# EAGLE board Smart_LIghts (EAGLE 9.5.1)
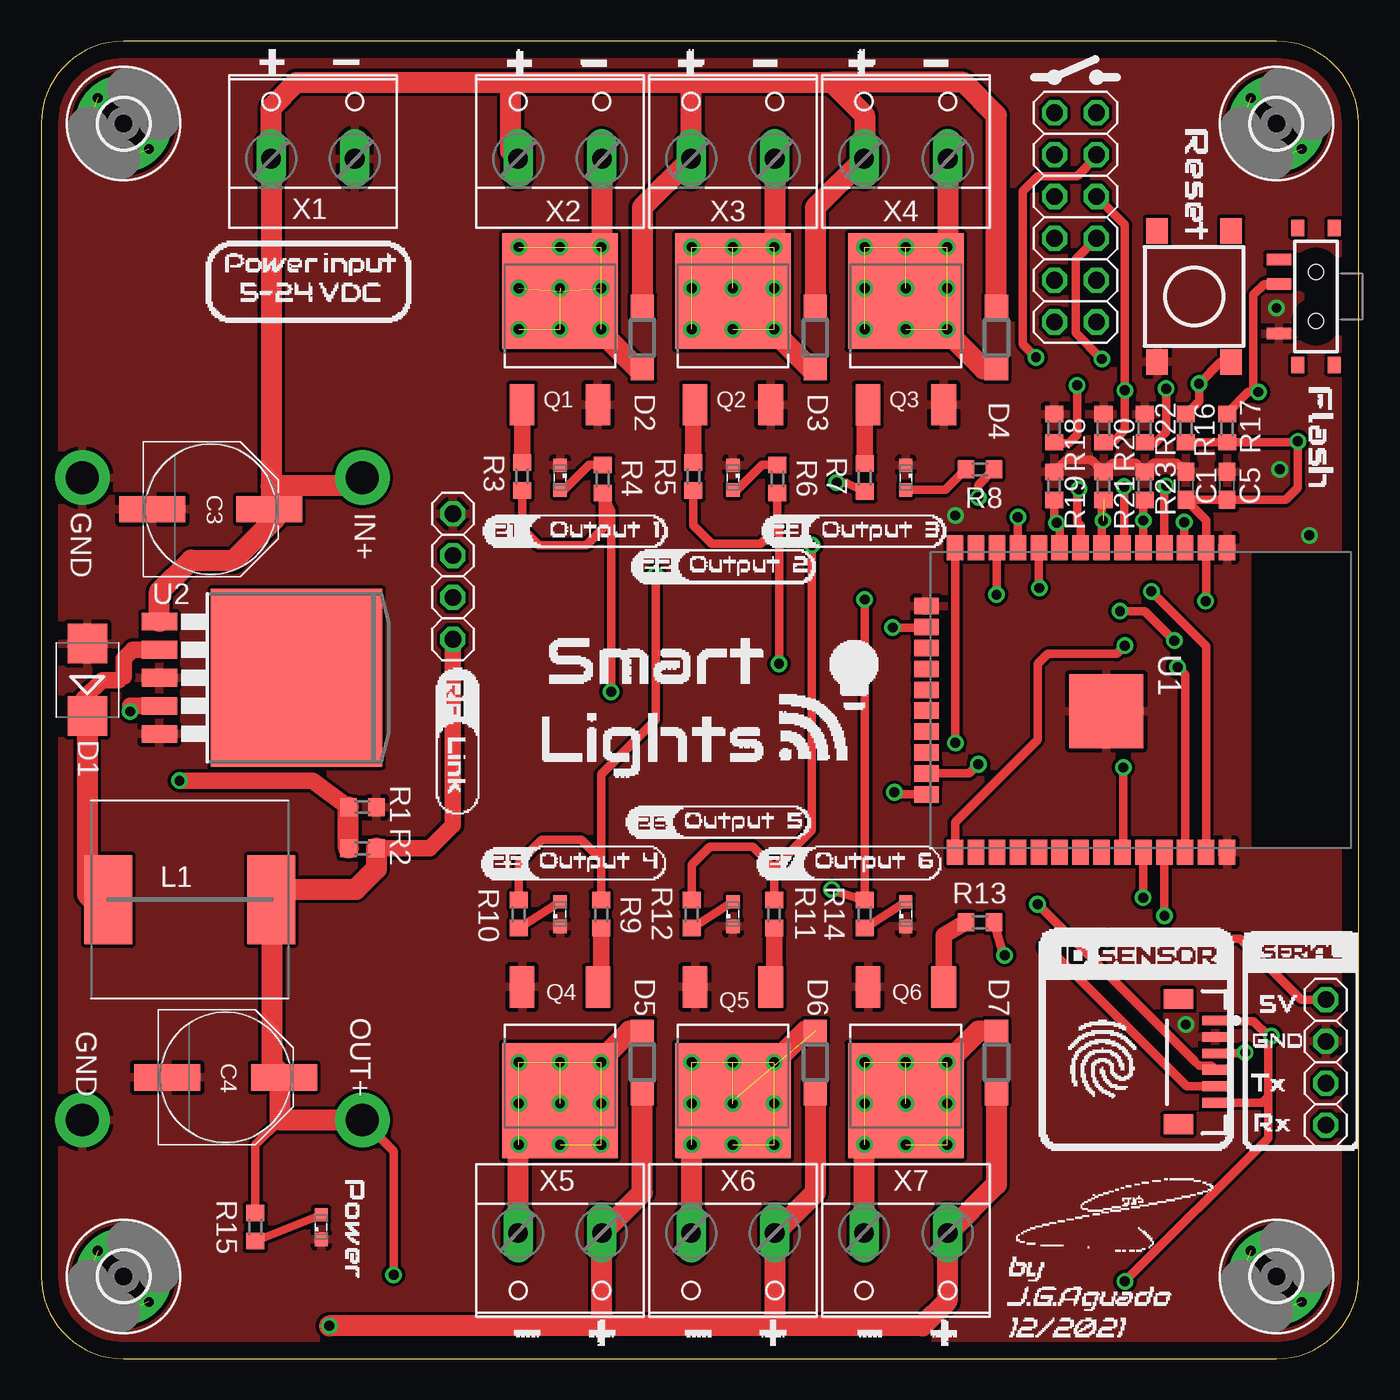
[diagram p0: board, top side]
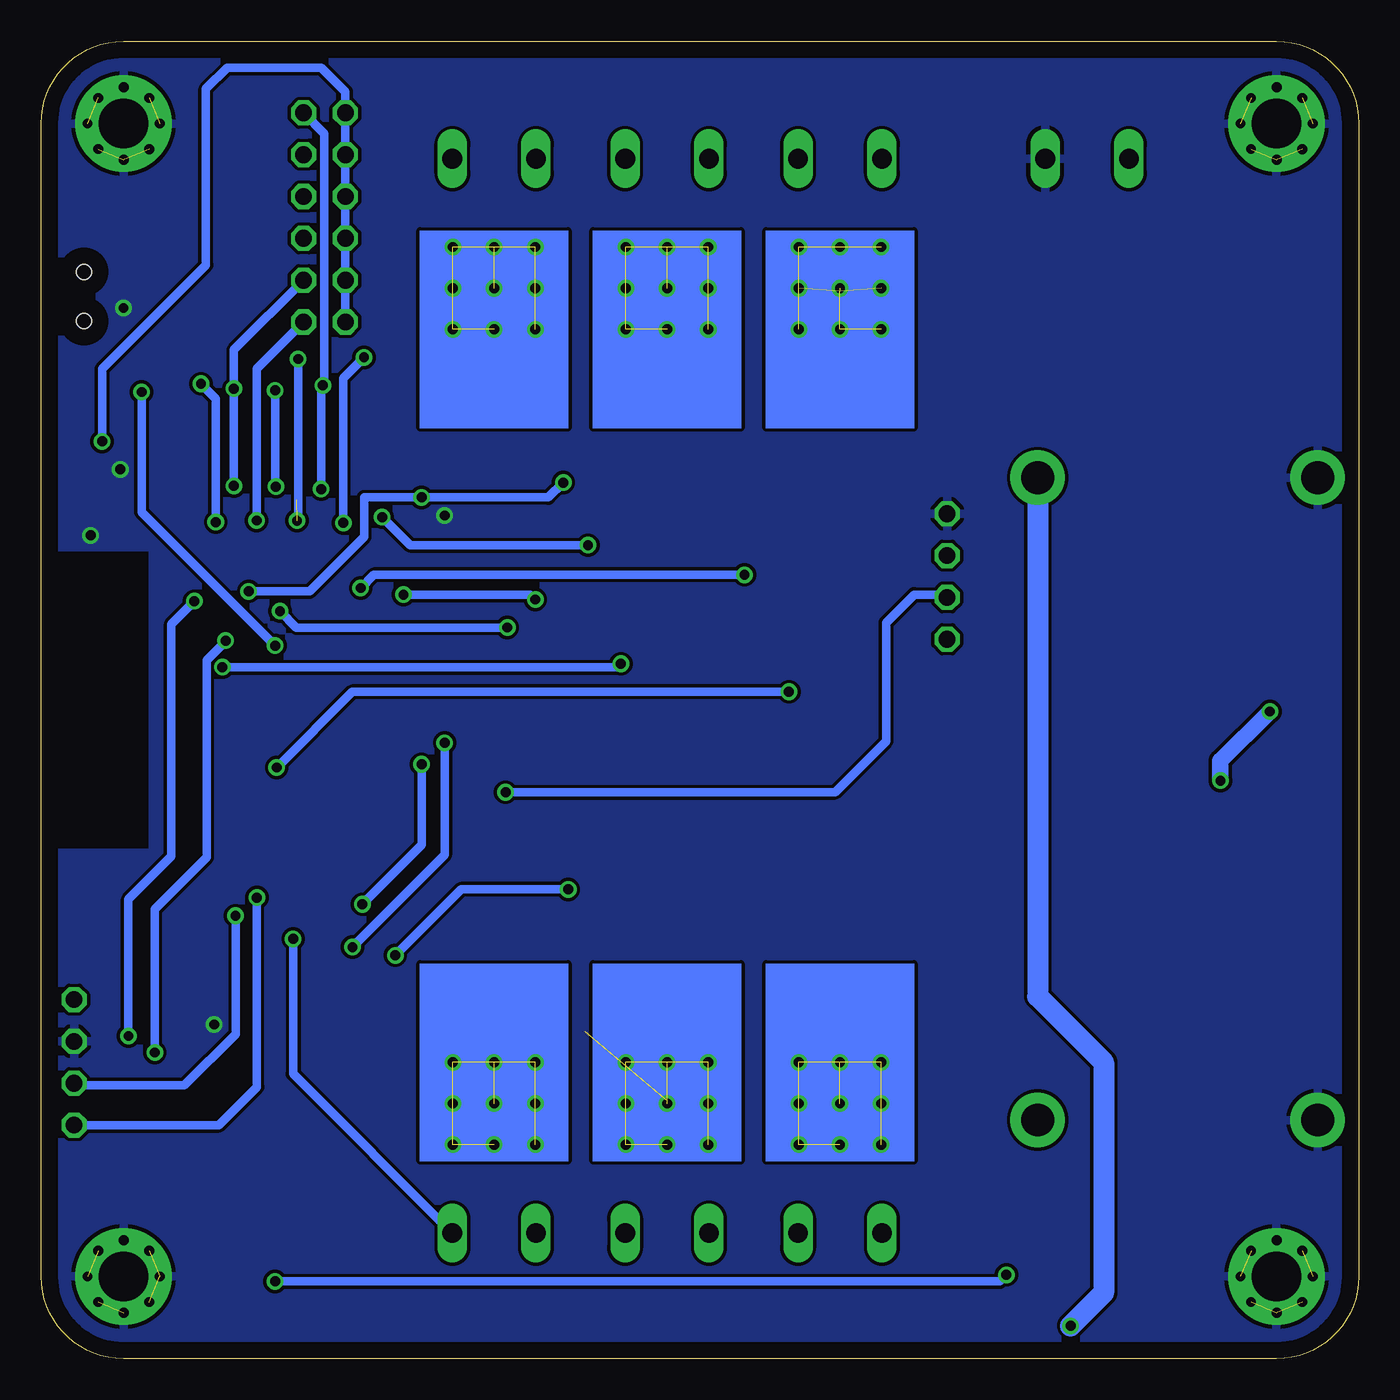
[diagram p1: board, bottom side, seen from below]

Size 80 x 80 mm. Coordinates in mm from the lower left corner, seen from the top.
Outline: 0,5 arc90 5,0 75,0 arc90 80,5 80,75 arc90 75,80 5,80 arc90 0,75 0,5
Copper layers (1*16): Top 0.035mm / dielectric 1.5mm / Bottom 0.035mm
Design rules "default": minimum track width 6mil, minimum drill 0.35mm, track to track 6mil, track to pad 6mil, pad to pad 6mil, via to via 6mil, smd to smd 6mil, copper to edge 40mil, drill to drill 6mil, minimum pad ring 10mil, minimum via ring 8mil, stop-mask expansion 4mil, vias tented up to drill 0mil, thermal gap 10mil
Net classes: 0 default: clearance 0.205 mm; 2 analog: width 0.203 mm, drill 0.33 mm, clearance 0.152 mm

## Footprints (pad centres in the part's own frame; a part is rotated, then mirrored left to right if it is on the bottom)
C0603 = smd 1.1 x 1: 1 -0.85,0; 2 0.85,0
PANASONIC_F = smd 4 x 1.6: + 3.55,0; - -3.55,0
SMB = smd 2.4 x 2.4: A 2.2,0; C -2.2,0
SOD123 = smd 1.4 x 1.4: A 1.9,0; C -1.9,0
3,0-PAD = drill 3 pad 5.842: B3,0 0,0
1X01_2MM = drill 2 pad 3.302: 1 0,0
1X04 = drill 1.016 octagon: 1 -3.81,0; 2 -1.27,0; 3 1.27,0; 4 3.81,0
JST-6-SMD-VERT-1.0MM = smd 0.6 x 1.55: 1 -2.54,1.27; 2 -1.54,1.27; 3 -0.54,1.27; 4 0.46,1.27; 5 1.46,1.27; 6 2.46,1.27 | smd 1.2 x 1.8: P$1 -3.84,-0.955; P$2 3.76,-0.955
2X06 = drill 1.016 octagon: 1 -6.35,-1.27; 2 -6.35,1.27; 3 -3.81,-1.27; 4 -3.81,1.27; 5 -1.27,-1.27; 6 -1.27,1.27; 7 1.27,-1.27; 8 1.27,1.27; 9 3.81,-1.27; 10 3.81,1.27; 11 6.35,-1.27; 12 6.35,1.27
WE-PD_1260/1245/1280/1210 = smd 2.9 x 5.4: 1 -4.95,0; 2 4.95,0
SML0603 = smd 0.8 x 0.8: A 0.75,0; C -0.75,0
INFINEON_TECHNOLOGIES_IRLR2905TRPBF_0 = smd 1.5 x 2.5: 1 -2.3,-4.575; 3 2.3,-4.575 | smd 7 x 7: 4 0,2.325
R0603 = smd 1 x 1.1: 1 -0.85,0; 2 0.85,0
TACTILE_SWITCH_TALL = smd 1.55 x 1.3: A1 -3.975,-2.25; A2 3.975,-2.25; B1 -3.975,2.25; B2 3.975,2.25
KPS-1290 = smd 0.7 x 1.5: O -2.25,2.25; P 0.75,2.25; S 2.25,2.25 | smd 1 x 0.8: P$1 -4.15,1.1; P$2 -4.15,-1.1; P$3 4.15,-1.1; P$4 4.15,1.1 | hole 0.9: -1.5,0; 1.5,0
ESP-32S = smd 1.5 x 1: 1 -9.25,7; 2 -9.25,5.73; 3 -9.25,4.46; 4 -9.25,3.19; 5 -9.25,1.92; 6 -9.25,0.65; 7 -9.25,-0.62; 8 -9.25,-1.89; 9 -9.25,-3.16; 10 -9.25,-4.43; 11 -9.25,-5.7; 12 -9.25,-6.97; 13 -9.25,-8.24; 14 -9.25,-9.51; 25 9.25,-9.51; 26 9.25,-8.24; 27 9.25,-6.97; 28 9.25,-5.7; 29 9.25,-4.43; 30 9.25,-3.16; 31 9.25,-1.89; 32 9.25,-0.62; 33 9.25,0.65; 34 9.25,1.92; 35 9.25,3.19; 36 9.25,4.46; 37 9.25,5.73; 38 9.25,7 | smd 1 x 1.5: 15 -5.7,-11.25; 16 -4.43,-11.25; 17 -3.16,-11.25; 18 -1.89,-11.25; 19 -0.62,-11.25; 20 0.65,-11.25; 21 1.92,-11.25; 22 3.19,-11.25; 23 4.46,-11.25; 24 5.73,-11.25 | smd 4.5 x 4.5: GND 0.68,-0.33
TO263-5 = smd 1.067 x 2.159: 1 -3.404,-5.791; 2 -1.702,-5.791; 3 0,-5.791; 4 1.702,-5.791; 5 3.404,-5.791 | smd 10.8 x 10.41: 6 0,2.54
W237-132 = drill 1.194 long: 1 -2.54,-0.635; 2 2.54,-0.635

## Placement (x,y rotation side)
C1  100nF  [C0603]  69.5,53 90 top
C3  330µ/50V  [PANASONIC_F]  10.29,51.59 0 top
C4  220µ/35V Low ESR  [PANASONIC_F]  11.2,17.09 0 top
C5  22uF  [C0603]  72,53 90 top
D1  SS34  [SMB]  2.81,41.22 90 top
D2  [SOD123]  36.5,62 270 top
D3  [SOD123]  47,62 270 top
D4  [SOD123]  58,62 270 top
D5  [SOD123]  36.5,18 90 top
D6  [SOD123]  47,18 90 top
D7  [SOD123]  58,18 90 top
H1  MOUNT-PAD-ROUND3.0  [3,0-PAD]  5,5 0 top
H2  MOUNT-PAD-ROUND3.0  [3,0-PAD]  5,75 0 top
H3  MOUNT-PAD-ROUND3.0  [3,0-PAD]  75,5 0 top
H4  MOUNT-PAD-ROUND3.0  [3,0-PAD]  75,75 0 top
H5  [1X01_2MM]  19.5,53.5 270 top
H6  [1X01_2MM]  2.5,53.5 270 top
H7  [1X01_2MM]  19.5,14.5 270 top
H8  [1X01_2MM]  2.5,14.5 270 top
J1  [1X04]  25,47.5 90 top
J2  JST_6_PIN_VERTICAL  [JST-6-SMD-VERT-1.0MM]  70,18 270 top
J3  [1X04]  78,18 270 top
JP1  [2X06]  62.8,69.3 270 top
L1  47µH  [WE-PD_1260/1245/1280/1210]  9.03,27.89 0 top
LED1  Green  [SML0603]  17,8 90 top
LED2  Blue  [SML0603]  31.5,53.5 270 top
LED3  Blue  [SML0603]  42,53.5 270 top
LED4  Blue  [SML0603]  52.5,53.5 270 top
LED5  Blue  [SML0603]  31.5,27 90 top
LED6  Blue  [SML0603]  42,27 90 top
LED7  Blue  [SML0603]  52.5,27 90 top
Q1  IRLR2905TRPBF  [INFINEON_TECHNOLOGIES_IRLR2905TRPBF_0]  31.5,62.5 0 top
Q2  IRLR2905TRPBF  [INFINEON_TECHNOLOGIES_IRLR2905TRPBF_0]  42,62.5 0 top
Q3  IRLR2905TRPBF  [INFINEON_TECHNOLOGIES_IRLR2905TRPBF_0]  52.5,62.5 0 top
Q4  IRLR2905TRPBF  [INFINEON_TECHNOLOGIES_IRLR2905TRPBF_0]  31.5,18 180 top
Q5  IRLR2905TRPBF  [INFINEON_TECHNOLOGIES_IRLR2905TRPBF_0]  42,18 180 top
Q6  IRLR2905TRPBF  [INFINEON_TECHNOLOGIES_IRLR2905TRPBF_0]  52.5,18 180 top
R1  1k  [R0603]  19.5,33.5 0 top
R2  1.6k  [R0603]  19.5,31 180 top
R3  100  [R0603]  29.2,53.58 270 top
R4  330  [R0603]  34.1,53.42 90 top
R5  100  [R0603]  39.6,53.58 270 top
R6  330  [R0603]  44.7,53.42 90 top
R7  100  [R0603]  50,53.5 270 top
R8  330  [R0603]  57,54 180 top
R9  100  [R0603]  34,27 90 top
R10  330  [R0603]  29,27 270 top
R11  100  [R0603]  44.5,27 90 top
R12  330  [R0603]  39.5,27 270 top
R13  100  [R0603]  57,26.5 0 top
R14  330  [R0603]  50,27 270 top
R15  470  [R0603]  13,8 90 top
R16  10K  [R0603]  69.5,56.5 270 top
R17  10k  [R0603]  72,56.5 90 top
R18  10K  [R0603]  61.5,56.5 270 top
R19  10K  [R0603]  61.5,53 270 top
R20  10K  [R0603]  64.5,56.5 270 top
R21  10K  [R0603]  64.5,53 270 top
R22  10K  [R0603]  67,56.5 270 top
R23  10K  [R0603]  67,53 270 top
S1  Reset  [TACTILE_SWITCH_TALL]  70,64.5 270 top
S2  SWITCH_SPDT  [KPS-1290]  77.4,64.5 90 top
U1  ESP-32S  [ESP-32S]  65,40 270 top
U2  LM2596S  [TO263-5]  12.97,41.35 270 top
X1  [W237-132]  16.5,73.5 0 top
X2  [W237-132]  31.5,73.5 0 top
X3  [W237-132]  42,73.5 0 top
X4  [W237-132]  52.5,73.5 0 top
X5  [W237-132]  31.5,7 180 top
X6  [W237-132]  42,7 180 top
X7  [W237-132]  52.5,7 180 top

## Library data of the parts
C1 C5 = rcl; SPICEPREFIX: C
C3 = rcl; MF: Panasonic; MFN: EEVFK1H221P; SPICEPREFIX: C
C4 = rcl; MF: Panasonic; MFN: EINTRAGEN!; SPICEPREFIX: C
D1-D7 = diode
H1-H4 = holes
H5-H8 = SparkFun-Connectors
J1 J3 JP1 = pinhead
J2 = SparkFun-Connectors; PROD_ID: CONN-08249; SF_ID: GPS-00579
L1 = Wurth_Elektronik_Passive_rev15b; MF: Wuerth
LED1-LED7 = led
Q1-Q6 = Infineon Technologies - IRLR2905TRPBF; AUTOMOTIVE: No; CENTROID_NOT_SPECIFIED: Yes; CONTINUOUS_DRAIN_CURRENT: 42A; DATASHEET: https://www.infineon.com/dgdl/irlr2905pbf.pdf?fileId=5546d462533600a40153566cc2bb2679; DEPLETION_MODE: False; DEVICE_CLASS_L1: Discrete Semiconductors; DEVICE_CLASS_L2: Transistors; DEVICE_CLASS_L3: MOSFETs; DIGIKEY_DESCRIPTION: TRANS MOSFET N-CH 55V 42A DPAK; DIGIKEY_PART_NUMBER: IRLR2905PBFCT-ND; DRAIN_TO_SOURCE_BREAKDOWN_VOLTAGE: 55V; DRAIN_TO_SOURCE_RESISTANCE: 0.03Ω; DRAIN_TO_SOURCE_VOLTAGE: 55V; FOOTPRINT_URL: http://www.irf.com/package/hexfet/dpakfootprint.pdf; FOOTPRINT_VARIANT_NAME_0: Recommended_Land_Pattern; GATE_CHARGE_AT_VGS: 48nC @ 5V; GATE_TO_SOURCE_VOLTAGE: 16V; HEIGHT: 2.52mm; INPUT_CAPACITACE_AT_VDS: 1700pF @ 25V; LEAD_FREE: Yes; MAX_FORWARD_DIODE_VOLTAGE: 1.3V; MAX_JUNCTION_TEMP: +175°C; MF: Infineon Technologies; MFG_PACKAGE_IDENT: PG-TO252-3; MFG_PACKAGE_IDENT_DATE: 0; MFG_PACKAGE_IDENT_REV: 901; MOUSER_PART_NUMBER: 942-IRLR2905TRPBF; MPN: IRLR2905TRPBF; NUMBER_OF_CHANNELS: 1; NUMBER_OF_N_CHANNELS: 1; PACKAGE: D-Pak; POWER_DISSIPATION: 110W; PREFIX: Q; PULSE_DRAIN_CURRENT: 160A; REVERSE_RECOVERY_CHARGE: 210nC; REVERSE_RECOVERY_TIME: 80ns; ROHS: Yes; RTHJA_MAX: 110°C/W; TEMPERATURE_RANGE_HIGH: +175°C; TEMPERATURE_RANGE_LOW: -55°C; THRESHOLD_VGS_MAX: 2V; THRESHOLD_VGS_MIN: 1V; TURN_OFF_DELAY_TIME: 26ns; TURN_ON_DELAY_TIME: 11ns; VERIFICATION_VERSION: 0.0.0.3
R1-R23 = rcl; SPICEPREFIX: R
S1 = Testing
S2 = SparkFun-Retired; PROD_ID: SWCH-10651
U1 = esp32
U2 = national-semiconductor; MF: NATIONAL SEMICONDUCTOR; MPN: LM2596S-ADJ/NOPB; OC_FARNELL: 9494367; OC_NEWARK: 41K3842
X1-X7 = con-wago-508; OC_FARNELL: unknown; OC_NEWARK: unknown

## Nets
3.3V: C1.1 C4.+ C5.1 H7.1 J1.1 J2.1 J2.6 JP1.1 JP1.3 JP1.5 JP1.7 JP1.9 JP1.11 L1.2 R2.1 R15.2 R16.2 R17.1 U1.2
CH_1: R3.2 R4.1 U1.33
CH_2: R5.2 R6.1 U1.36
CH_3: R7.2 R8.1 U1.37
CH_4: R9.2 R10.1 U1.10
CH_5: R11.2 R12.1 U1.11
CH_6: R13.2 R14.1 U1.12
CLK: U1.20
CMD: U1.19
GND: C1.2 C3.- C4.- C5.2 D1.A H1.B3,0 H2.B3,0 H3.B3,0 H4.B3,0 H6.1 H8.1 J1.4 J2.2 J3.2 LED1.C LED2.C LED3.C LED4.C LED5.C LED6.C LED7.C Q1.3 Q2.3 Q3.3 Q4.3 Q5.3 Q6.3 R1.2 R18.1 R19.1 R20.1 R21.1 R22.1 R23.1 S1.A2 S2.O U1.1 U1.15 U1.38 U1.GND U2.3 U2.5 X1.2
IN_1: JP1.2 R18.2 U1.8
IN_2: JP1.4 R19.2 U1.9
IN_3: JP1.6 R20.2 U1.6
IN_4: JP1.8 R21.2 U1.7
IN_5: JP1.10 R22.2 U1.4
IN_6: JP1.12 R23.2 U1.5
IO0: R17.2 S2.P U1.25
IO4: U1.26
IO5: U1.29
IO14: U1.13
IO16: U1.27
IO17: U1.28
IO18: U1.30
IO19: U1.31
N$1: Q2.1 R5.1
N$2: D1.C L1.1 U2.2
N$3: R1.1 R2.2 U2.4
N$4: D2.A Q1.4 X2.2
N$5: Q1.1 R3.1
N$6: D3.A Q2.4 X3.2
N$7: Q3.1 R7.1
N$8: D4.A Q3.4 X4.2
N$9: Q4.1 R9.1
N$10: D5.A Q4.4 X5.2
N$11: Q5.1 R11.1
N$12: D6.A Q5.4 X6.2
N$13: Q6.1 R13.1
N$14: D7.A Q6.4 X7.2
N$15: LED1.A R15.1
N$16: LED4.A R8.2
N$17: LED2.A R4.2
N$18: LED3.A R6.2
N$19: LED5.A R10.2
N$20: LED6.A R12.2
N$21: LED7.A R14.2
RC_DATA: J1.2 U1.24
RST: R16.1 S1.B2 U1.3
RX: J3.4 U1.34
RXD: J2.4 U1.23
SD0: U1.21
SD1: U1.22
SD2: U1.17
SD3: U1.18
TX: J3.3 U1.35
TXD: J2.3 U1.16
VCC: C3.+ D2.C D3.C D4.C D5.C D6.C D7.C H5.1 J3.1 U2.1 X1.1 X2.1 X3.1 X4.1 X5.1 X6.1 X7.1
WAKE_UP: J2.5 U1.14

## Tracks (layer width: path | path; a pad name or v marks a point on that pad's centre or on a via)
3.3V  (via drill 0.6)
  Top 0.508: 14.5,14.5 13,13 R15.2 | J2.1 71.31,20.5 73.6,20.5 74.5,19.6 | 74.5,19.6 74.7,19.4 v74.7,19.6 | 74.5,19.6 74.5,15.9 | 74.5,15.9 74.14,15.54 J2.6 | 74.5,15.9 74.5,13.4 v65.8,4.7 | v21.4,5.1 21.4,12.6 H7.1 | R16.2 R17.1 76.25,55.65 | 76.25,55.65 v76.3,55.7 | 76.25,55.65 76.3,55.6 76.3,52.9 75.55,52.15 C5.1 C1.1 70.73,50.92 U1.2 70.73,46.03 v70.7,46
  Top 1.016: J1.1 25,32.4 23.6,31 R2.1
  Top 1.27: H7.1 14.5,14.5 14.5,16.84 C4.+ 14,17.84 14,28.5 14.59,28.5 | R2.1 20.35,29.75 19.1,28.5 14.59,28.5 | L1.2 14.59,28.5
  Bottom 0.508: v65.8,4.7 21.8,4.7 v21.4,5.1 | v74.7,19.6 74.7,27.9 72.1,30.5 72.1,44.6 v70.7,46 | v76.3,55.7 76.3,60.1 70,66.4 70,77.1 68.7,78.4 63,78.4 61.53,76.93 JP1.1 JP1.3 JP1.5 JP1.7 JP1.9 JP1.11
CH_1  (via drill 0.6)
  Top 0.508: R3.2 29.2,50.4 30.2,49.4 33.1,49.4 34.1,50.4 R4.1 34.6,51.5 v34.6,40.5 | v65.7,35.9 65.7,30.8 U1.33
  Bottom 0.508: v34.6,40.5 61.1,40.5 v65.7,35.9
CH_2  (via drill 0.6)
  Top 0.508: R5.2 39.6,50.6 40.7,49.5 43.7,49.5 44.7,50.5 44.7,51 | 44.7,51 R6.1 | U1.36 69.46,41.54 v69,42 | v44.8,42.2 44.8,50.9 44.7,51
  Bottom 0.508: v69,42 45,42 v44.8,42.2
CH_3  (via drill 0.6)
  Top 0.508: R7.2 48.88,53.2 v48.3,53.2 | R8.1 56.9,53.05 v56.9,52.3 | U1.37 70.73,43.27 v67.4,46.6
  Bottom 0.508: v48.3,53.2 49.2,52.3 v56.9,52.3 60.4,52.3 60.4,49.9 63.7,46.6 v67.4,46.6
CH_4  (via drill 0.6)
  Top 0.508: R10.1 29,30.1 30.4,31.5 32.8,31.5 34,30.3 R9.2 34,35.5 37.3,38.8 v37.3,47.6 | v60.6,46.8 60.57,46.83 U1.10
  Bottom 0.508: v37.3,47.6 59.8,47.6 v60.6,46.8
CH_5  (via drill 0.6)
  Top 0.508: R11.2 44.5,29.8 | 44.5,29.8 43.2,31.1 40.6,31.1 39.5,30 R12.1 | U1.11 v59.3,51.1 | v46.8,49.4 46.8,32.1 44.5,29.8
  Bottom 0.508: v59.3,51.1 57.6,49.4 v46.8,49.4
CH_6  (via drill 0.6)
  Top 0.508: v48,28.5 48.08,28.42 R14.1 v50,46.1 | v58.5,24.5 58.42,24.58 R13.2 | U1.12 58.03,46.43 v58,46.4
  Bottom 0.508: v48,28.5 54.5,28.5 v58.5,24.5 | v58,46.4 50.3,46.4 v50,46.1
GND  (via drill 0.6)  (16 unrouted)
  Top 0.508: C1.2 68.95,54.4 67.55,54.4 R23.1 66.45,54.4 65.05,54.4 R21.1 63.75,54.6 62.25,54.6 R19.1
  other vias: 75,63.8 69.5,20.3 77,50 55.5,51.2 72.8,5 73.44,6.55 74.99,7.19 76.54,6.55 77.19,5 76.54,3.45 74.99,2.81 73.44,3.45 2.8,5 3.44,6.55 4.99,7.19 6.54,6.55 7.19,5 6.54,3.45 4.99,2.81 3.44,3.45 2.8,75 3.44,76.55 4.99,77.19 6.54,76.55 7.19,75 6.54,73.45 4.99,72.81 3.44,73.45 72.8,75 73.44,76.55 74.99,77.19 76.54,76.55 77.19,75 76.54,73.45 74.99,72.81 73.44,73.45 75.2,54
  pour Top: 5,80 arc90 0,75 0,5 arc90 5,0 75,0 arc90 80,5 80,75 arc90 75,80
  pour Bottom: 5,80 arc90 0,75 0,5 arc90 5,0 75,0 arc90 80,5 80,75 arc90 75,80
IN_1  (via drill 0.6)
  Top 0.508: U1.8 63.11,50.59 62.9,50.8 62.9,52.7 v63,52.8 | v62.9,59.1 62.9,56.1 62.4,55.6 61.55,55.6 R18.2
  Bottom 0.508: JP1.2 62.8,74.38 62.8,59.2 v62.9,59.1 63,59 v63,52.8
IN_2  (via drill 0.6)
  Top 0.508: R19.2 61.5,50.9 v61.65,50.75 61.84,50.56 U1.9 | v60.4,60.8 59.6,61.6 59.6,70.9 60.5,71.8 62.9,71.8 64.07,72.97 JP1.4
  Bottom 0.508: v61.65,50.75 61.65,59.55 v60.4,60.8
IN_3  (via drill 0.6)
  Top 0.508: JP1.6 65.8,68.84 v65.8,58.8 65.8,56.4 65.05,55.65 R20.2 | v65.75,52.95 65.75,49.35 U1.6
  Bottom 0.508: v65.8,58.8 65.8,53 v65.75,52.95
IN_4  (via drill 0.6)  (1 unrouted)
  Top 0.508: R21.2 64.38,52.03 U1.7 | JP1.8 62.8,66.76 62.8,62.3 v64.4,60.7
  Bottom 0.508: v64.4,60.7 64.4,50.96 v64.47,50.89
IN_5  (via drill 0.6)
  Top 0.508: U1.4 68.19,52.89 v68.3,53 | v68.3,58.9 68.3,56.3 67.6,55.6 67.05,55.6 R22.2
  Bottom 0.508: JP1.10 68.3,61.26 v68.3,58.9 v68.3,53
IN_6  (via drill 0.6)
  Top 0.508: R23.2 66.92,52.07 v66.92,50.9 U1.5
  Bottom 0.508: JP1.12 66.92,60.1 v66.92,50.9
IO0  (via drill 0.6)
  Top 0.508: S2.P 74.25,65.25 73.6,64.6 73.6,59 v73.9,58.7 73.3,58.7 72,57.4 R17.2 | U1.25 55.49,32.59 60.5,37.6 60.5,42.2 61.1,42.8 65.3,42.8 v65.8,43.3
  Bottom 0.508: v65.8,43.3 73.9,51.4 v73.9,58.7
N$1
  Top 1.016: R5.1 39.6,57.83 Q2.1
N$2
  Top 1.016: U2.2 5.55,43.05 5,42.5 5,41.4 4.9,41.4 4.7,41.2 3.7,41.2 2.6,40.1 2.6,39.23 D1.C
  Top 1.27: D1.C 2.81,28.19 4,27 4.08,27.07 L1.1
N$3  (via drill 0.6)
  Top 1.016: U2.4 5.4,39.65 v5.4,39.3 | v8.4,35.1 16.48,35.1 R1.1
  Top 1.27: R2.2 R1.1
  Bottom 1.016: v5.4,39.3 8.4,36.3 v8.4,35.1
N$4  (via drill 0.6)  (9 unrouted)
  Top 1.27: X2.2 34.04,67.36 Q1.4 36.23,60.1 D2.A
  other vias: 29,67.5 34,67.5 31.5,67.5 29,65 29,62.5 31.5,62.5 34,62.5 34,65 31.5,65
N$5
  Top 1.016: Q1.1 R3.1
N$6
  Top 1.27: X3.2 44.54,67.36 Q2.4 46.73,60.1 D3.A
N$7
  Top 1.016: R7.1 50,57.73 Q3.1
N$8
  Top 1.27: X4.2 55.04,67.36 Q3.4 57.23,60.1 D4.A
N$9
  Top 1.016: R9.1 34,22.77 Q4.1
N$10
  Top 1.27: X5.2 28.96,13.13 Q4.4 35.73,19.9 D5.A
N$11
  Top 1.016: R11.1 44.5,22.77 Q5.1
N$12  (1 unrouted)
  Top 1.27: D6.A 46.4,19.9 39.46,12.96 X6.2
N$13
  Top 1.016: R13.1 54.8,25.72 Q6.1
N$14
  Top 1.27: X7.2 49.96,13.13 Q6.4 52.67,15.68 56.9,19.9 D7.A
N$15
  Top 0.508: LED1.A R15.1
N$16
  Top 0.508: LED4.A 54.9,52.75 R8.2
N$17
  Top 0.508: R4.2 33.27,54.27 31.75,52.75 LED2.A
N$18
  Top 0.508: LED3.A 42.25,52.75 43.77,54.27 R6.2
N$19
  Top 0.508: LED5.A R10.2
N$20
  Top 0.508: R12.2 LED6.A
N$21
  Top 0.508: R14.2 LED7.A
N$22  (via drill 0.6)  (8 unrouted)
  other vias: 39.5,67.5 44.5,67.5 42,67.5 39.5,65 39.5,62.5 42,62.5 44.5,62.5 44.5,65 42,65
N$23  (via drill 0.6)  (8 unrouted)
  other vias: 50,67.5 55,67.5 52.5,67.5 50,65 50,62.5 52.5,62.5 55,62.5 55,65 52.5,65
N$24  (via drill 0.6)  (8 unrouted)
  other vias: 29,18 34,18 31.5,18 29,15.5 29,13 31.5,13 34,13 34,15.5 31.5,15.5
N$25  (via drill 0.6)  (8 unrouted)
  other vias: 39.5,18 44.5,18 42,18 39.5,15.5 39.5,13 42,13 44.5,13 44.5,15.5 42,15.5
N$26  (via drill 0.6)  (8 unrouted)
  other vias: 50,18 55,18 52.5,18 50,15.5 50,13 52.5,13 55,13 55,15.5 52.5,15.5
RC_DATA  (via drill 0.6)
  Top 0.508: U1.24 51.93,34.27 v51.8,34.4
  Bottom 0.508: v51.8,34.4 31.8,34.4 28.7,37.5 28.7,44.7 27,46.4 25.17,46.4 J1.2
RST  (via drill 0.6)
  Top 0.508: U1.3 69.4,49.31 v69.4,50.8 | R16.1 70.3,58.15 v70.3,59.2 71.62,60.52 S1.B2
  Bottom 0.508: v69.4,50.8 69.4,58.3 v70.3,59.2
RX  (via drill 0.6)
  Top 0.508: v66.9,28 66.9,30.73 U1.34
  Bottom 0.508: J3.4 69.21,14.19 66.9,16.5 v66.9,28
RXD  (via drill 0.6)
  Top 0.508: J2.4 71.03,17.78 70.31,17.78 70.04,18.05 70.04,18.06 v60.5,27.6 | U1.23 56.34,35.54 v56.9,36.1
  Bottom 0.508: v60.5,27.6 56.9,31.2 v56.9,36.1
TX  (via drill 0.6)
  Top 0.508: U1.35 v68.19,26.91 v68.2,26.9
  Bottom 0.508: v68.2,26.9 68.2,19.7 71.3,16.6 77.87,16.6 J3.3
TXD  (via drill 0.6)
  Top 0.508: J2.3 73.04,18.54 v73.1,18.6 | U1.16 53.72,44.4 v51.7,44.4 | v65.5,45.4 67,45.4 v68.8,43.6
  Bottom 0.508: v73.1,18.6 73.1,27.3 69.96,30.44 69.96,42.4 68.8,43.56 v68.8,43.6 | v51.7,44.4 64.5,44.4 v65.5,45.4
VCC  (via drill 0.6)
  Top 0.2: 47,64.5 D3.C
  Top 0.508: J3.1 76.49,21.81 72.8,25.5 v64.7,25.5
  Top 1.27: 28.5,77.5 15.5,77.5 13.96,75.96 X1.1 13.96,53 | 28.5,77.5 39.5,77.5 | 39.5,77.5 48,77.5 | 48,77.5 50,75.5 50,72.91 X4.1 47,69.91 47,64.5 | 39.5,77.5 39.46,77.46 X3.1 36.5,69.91 D2.C | X2.1 28.5,73.33 28.5,77.5 | 13.96,53 13.96,51.7 C3.+ | H5.1 19,53 13.96,53 | D4.C 58,75.5 56,77.5 48,77.5 | 44.5,2 53.5,2 55,3.5 55,7.59 X7.1 58,10.6 D7.C | 44.5,2 34.5,2 | 34.5,2 34.04,2.46 X5.1 36.5,10.1 D5.C | 44.5,2 44.54,2.04 X6.1 47,10.1 D6.C | 34.5,2 v17.5,2 | U2.1 7.18,46.58 9.1,48.5 11.7,48.5 14.2,51 14.2,52.76 13.96,53
  Bottom 0.508: v64.7,25.5 64.7,17.3 X7.1
  Bottom 1.27: H5.1 19.5,22 15.5,18 15.5,4 v17.5,2
WAKE_UP  (via drill 0.6)
  Top 0.508: U1.14 v55.49,37.41 v55.5,37.4 | v61.1,25 69.56,16.54 J2.5
  Bottom 0.508: v55.5,37.4 55.5,30.6 v61.1,25
(copper drawn outside any net)
  shapes: Bottom area x6

## Text on the board
tPlace: GND | IN+ | OUT+ | GND